# Altium PCB Layout.pcbdoc
Units mil, origin at the board's own origin, x right, y up, seen from the top; angles counter-clockwise.
Board outline 6990.03 x 6553.77 mil, 2 copper layers (Top Layer, Bottom Layer); 55 components, 66 nets, 351 pads, 42 vias.
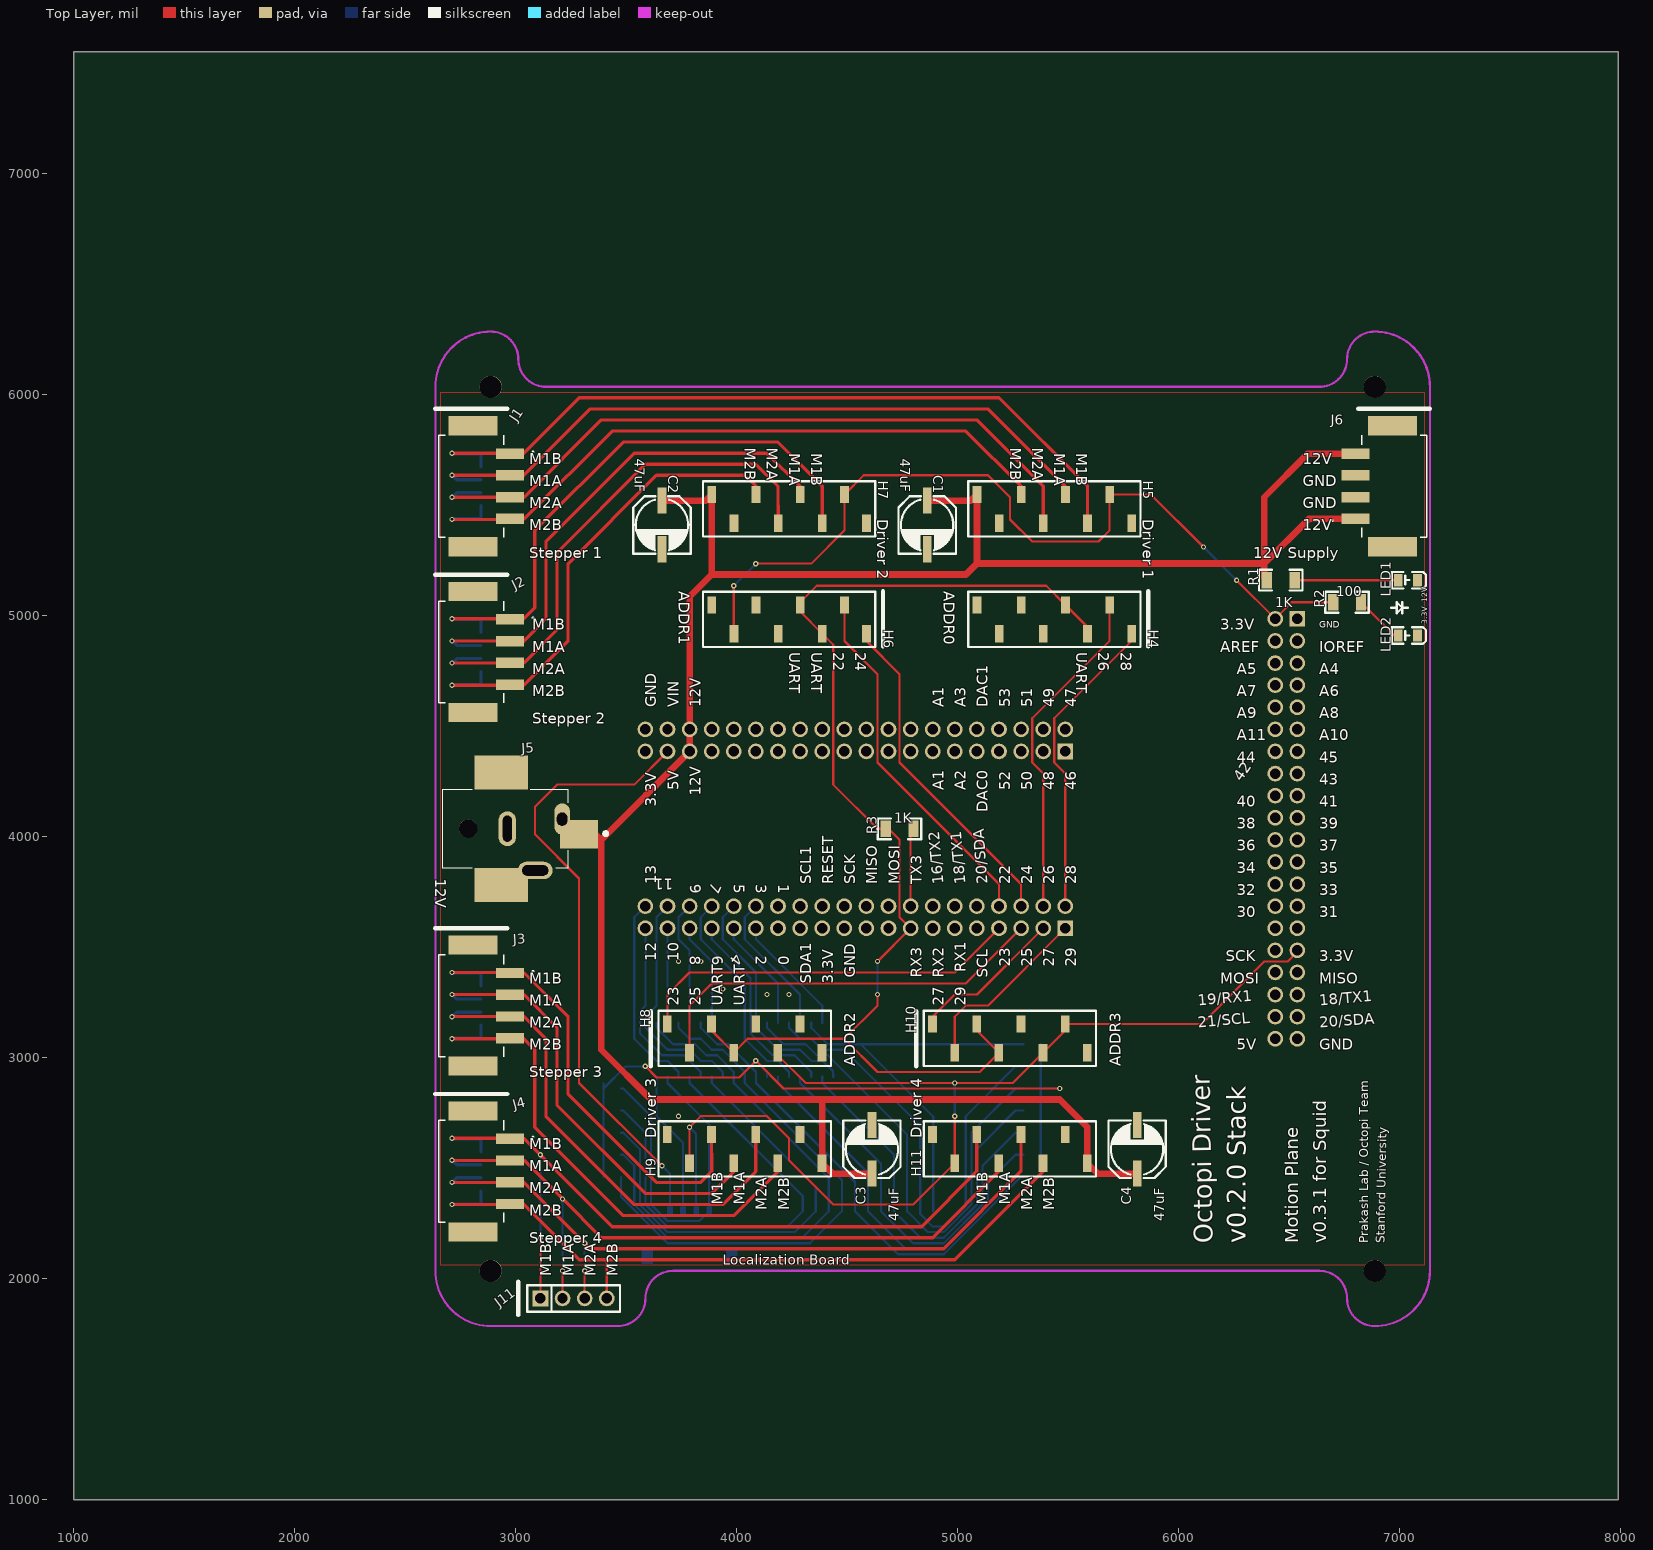
[diagram p0: Top Layer view]
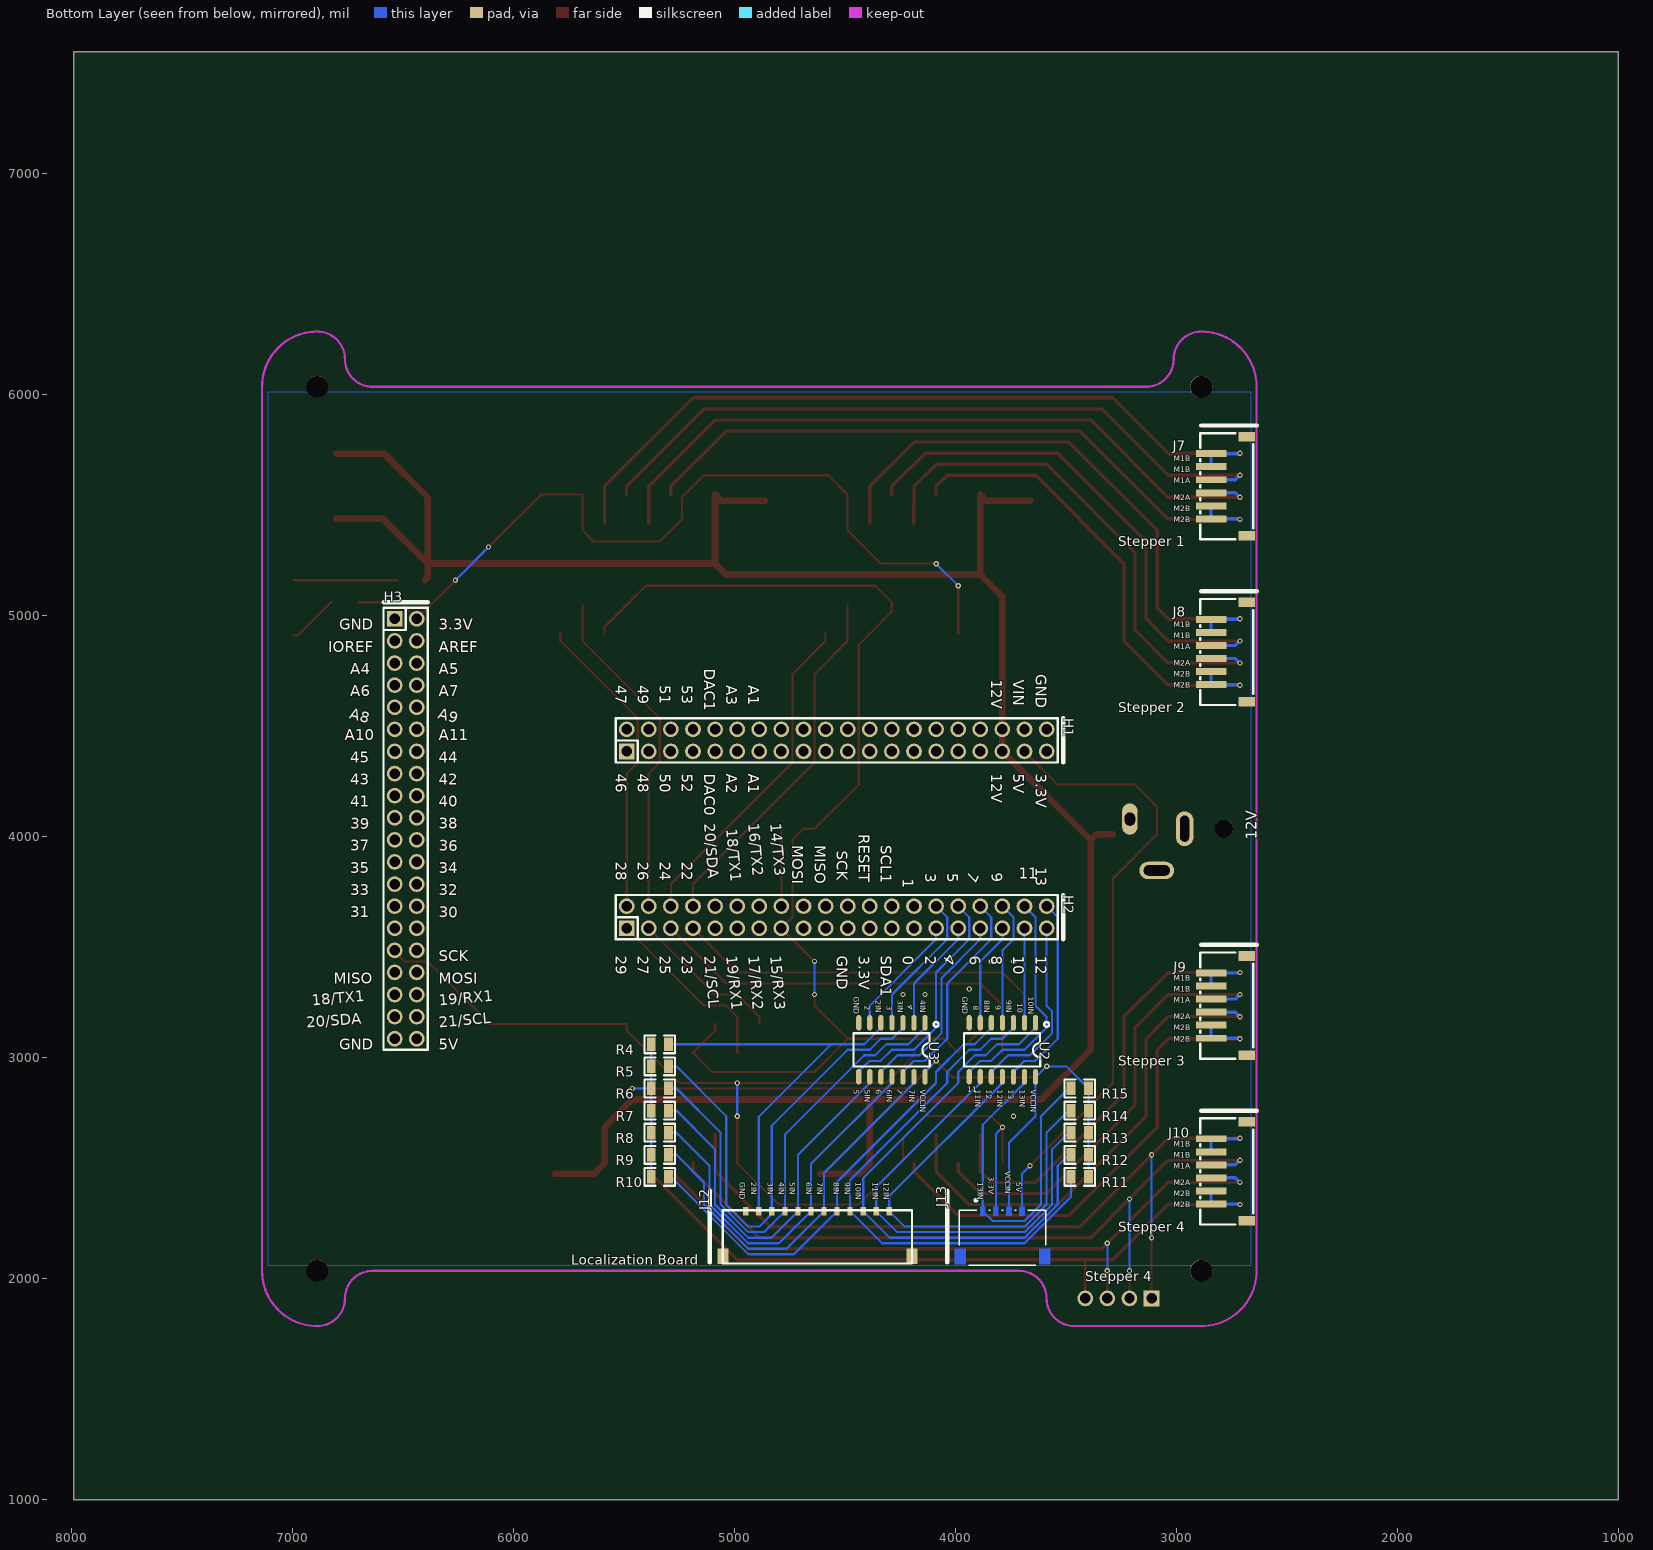
[diagram p1: Bottom Layer view, seen from below]

## Layer stack, top to bottom
Top Layer: signal copper (thickness not stored)
Dielectric: dielectric 12.6, FR-4, Dk 4.8
Bottom Layer: signal copper (thickness not stored)

## Board outline
7990.03,1000 1000,1000 1000,7553.77 7990.03,7553.77

## Components (designator, comment, footprint, x,y, rotation, side; value= is the part's Value field where it differs from the comment)
C1 "47uF" CAP-SMD_BD6.3-L6.6-W6.6-FD 4862.33,5411.97 r270 top
C2 "47uF" CAP-SMD_BD6.3-L6.6-W6.6-FD 3662.33,5411.97 r270 top
C3 "47uF" CAP-SMD_BD6.3-L6.6-W6.6-FD 4612.33,2586.97 r90 top
C4 "47uF" CAP-SMD_BD6.3-L6.6-W6.6-FD 5812.33,2586.97 r90 top
H1 "Header-Female-2.54_2x20" HDR-TH_40P-P2.54-V-R2-C20-S2.54 4537.33,4436.97 r0 bottom
H2 "Header-Female-2.54_2x20" HDR-TH_40P-P2.54-V-R2-C20-S2.54 4537.33,3636.97 r0 bottom
H3 "Header-Female-2.54_2x20" HDR-TH_40P-P2.54-V-R2-C20-S2.54 6487.33,4036.97 r90 bottom
H4 "Header-Female-2.54_1x2" NPPC081KFXC-RC 5437.33,4986.97 r0 top
H5 "Header-Female-2.54_1x2" NPPC081KFXC-RC 5437.33,5486.97 r0 top
H6 "Header-Female-2.54_1x2" NPPC081KFXC-RC 4237.33,4986.97 r0 top
H7 "Header-Female-2.54_1x2" NPPC081KFXC-RC 4237.33,5486.97 r0 top
H8 "Header-Female-2.54_1x2" NPPC081KFXC-RC 4037.33,3086.97 r180 top
H9 "Header-Female-2.54_1x2" NPPC081KFXC-RC 4037.33,2586.97 r180 top
H10 "Header-Female-2.54_1x2" NPPC081KFXC-RC 5237.33,3086.97 r180 top
H11 "Header-Female-2.54_1x2" NPPC081KFXC-RC 5237.33,2586.97 r180 top
J1 "1814935" 1814935 3037.33,5586.97 r270 top
J2 "1814935" 1814935 3037.33,4836.97 r270 top
J3 "1814935" 1814935 3037.33,3236.97 r270 top
J4 "1814935" 1814935 3037.33,2486.97 r270 top
J5 "PJ-037AH-SMT-TR" CUI_PJ-037AH-SMT-TR 3287.33,4011.97 r0 top
J6 "1814935" 1814935 6737.33,5586.97 r90 top
J7 "S6B-ZR-SM4A-TF(LF)(SN)" CONN-SMD_S6B-ZR-SM4A-TF 2762.33,5586.97 r270 bottom
J8 "S6B-ZR-SM4A-TF(LF)(SN)" CONN-SMD_S6B-ZR-SM4A-TF 2762.33,4836.97 r270 bottom
J9 "S6B-ZR-SM4A-TF(LF)(SN)" CONN-SMD_S6B-ZR-SM4A-TF 2762.33,3236.97 r270 bottom
J10 "S6B-ZR-SM4A-TF(LF)(SN)" CONN-SMD_S6B-ZR-SM4A-TF 2762.33,2486.97 r270 bottom
J11 "Header-Male-2.54_1x4" DIP-1X4P-2.54MM-M 3262.33,1911.97 r0 top
J12 "Molex_504050-1291" MOLEX_504050-1291 4287.33,2286.97 r180 bottom
J13 "MOLEX_504050-0491" MOLEX_504050-0491 3787.33,2186.97 r180 bottom
LED1 "17-21SYGC/S530-E2/TR8" LED0805-RD 7037.33,5161.97 r180 top
LED2 "17-21SYGC/S530-E2/TR8" LED0805-RD 7037.33,4911.97 r180 top
R1 "1K" R1206 6462.33,5161.97 r180 top
R2 "100" R1206 6762.33,5061.97 r180 top
R3 "1K" R1206 4737.33,4036.97 r0 top
R4 "4.7K" R0805 5337.33,3061.97 r0 bottom
R5 "4.7K" R0805 5337.33,2961.97 r0 bottom
R6 "4.7K" R0805 5337.33,2861.97 r0 bottom
R7 "4.7K" R0805 5337.33,2761.97 r0 bottom
R8 "4.7K" R0805 5337.33,2661.97 r0 bottom
R9 "4.7K" R0805 5337.33,2561.97 r0 bottom
R10 "4.7K" R0805 5337.33,2461.97 r0 bottom
R11 "4.7K" R0805 3437.33,2461.97 r180 bottom
R12 "4.7K" R0805 3437.33,2561.97 r180 bottom
R13 "4.7K" R0805 3437.33,2661.97 r180 bottom
R14 "4.7K" R0805 3437.33,2761.97 r180 bottom
R15 "4.7K" R0805 3437.33,2861.97 r180 bottom
U2 "74LVC07AD,118" SOIC-14_L8.7-W3.9-P1.27-LS6.0-BL 3787.33,3036.97 r180 bottom
U3 "74LVC07AD,118" SOIC-14_L8.7-W3.9-P1.27-LS6.0-BL 4287.33,3036.97 r180 bottom
? "" ? 7149.83,5250.05 r0 top
? "" ? 2222.91,4036.97 r0 top
? "" ? 2887.33,6581.87 r0 top
? "" ? 4887.33,6430.87 r0 top
? "" ? 2312.33,6369.72 r0 top
? "" ? 2294.66,1887 r0 top
? "" ? 2184.86,4036.97 r0 top
? "" ? 4887.33,6410.97 r0 top

## Footprints (in the part's own frame and the unit in brackets; to place one, negate y for a bottom-side part, rotate by r counter-clockwise, add the part's x,y. Pads: shape width x height; smd on the part's side, far side on the other; paste and mask are expansions set on the pad)
1814935 [mil]
  rect 47.24x125.98 smd: 1(-147.64,-62.99) 2(-49.21,-62.99) 3(49.21,-62.99) 4(147.64,-62.99)
  rect 86.61x220.47 smd: MP1(-273.62,-230.31) MP2(273.62,-230.31)
  silkscreen extent -230,-386 230,43
CAP-SMD_BD6.3-L6.6-W6.6-FD [mm]
  rect 3x1 smd: 1(-2.8,0) 2(2.8,0)
  silkscreen extent -3.3,-3.3 3.3,3.3
CONN-SMD_S6B-ZR-SM4A-TF [mm]
  rect 1.1x1.9 smd: 0(-5.7,2.05) 0(5.7,2.05)
  rect 0.8x3.5 smd: 1(-3.75,-2.05) 2(-2.25,-2.05) 3(-0.75,-2.05) 4(0.75,-2.05) 5(2.25,-2.05) 6(3.75,-2.05)
  silkscreen extent -6.1,-3.3 6.1,2.79
CUI_PJ-037AH-SMT-TR [mm]
  rect 4.4x3.3 smd: 1A(0,0)
  oval 1.8x3.6 hole 1.2 slot 1.5 at 90 deg: 1B(-1.95,1.75)
  rect 6.2x3.9 smd: 2A(-8.95,7.1) 3A(-8.95,-5.8)
  oval 2x4 hole 1 slot 3 at 90 deg: 2B(-8.25,0.65)
  oval 4x2 hole 1.2 slot 3 at 0 deg: 3B(-5.05,-4.15)
  round 2.1 hole 2.1 unplated: ""(-12.75,0.65)
  silkscreen extent -15.75,-3.85 3.26,5.15
DIP-1X4P-2.54MM-M [mm]
  rect 1.8x1.8 hole 1.2: 1(-3.81,0)
  round 1.8 hole 1.2: 2(-1.27,0) 3(1.27,0) 4(3.81,0)
  silkscreen extent -5.33,-1.52 5.33,1.52
HDR-TH_40P-P2.54-V-R2-C20-S2.54 [mm]
  rect 1.8x1.8 hole 1.2: 1(24.13,1.27)
  round 1.8 hole 1.2: 2(24.13,-1.27) 3(21.59,1.27) 4(21.59,-1.27) 5(19.05,1.27) 6(19.05,-1.27) 7(16.51,1.27) 8(16.51,-1.27) 9(13.97,1.27) 10(13.97,-1.27) 11(11.43,1.27) 12(11.43,-1.27) 13(8.89,1.27) 14(8.89,-1.27) 15(6.35,1.27) 16(6.35,-1.27) 17(3.81,1.27) 18(3.81,-1.27) 19(1.27,1.27) 20(1.27,-1.27) 21(-1.27,1.27) 22(-1.27,-1.27) 23(-3.81,1.27) 24(-3.81,-1.27) 25(-6.35,1.27) 26(-6.35,-1.27) 27(-8.89,1.27) 28(-8.89,-1.27) 29(-11.43,1.27) 30(-11.43,-1.27) 31(-13.97,1.27) 32(-13.97,-1.27) 33(-16.51,1.27) 34(-16.51,-1.27) 35(-19.05,1.27) 36(-19.05,-1.27) 37(-21.59,1.27) 38(-21.59,-1.27) 39(-24.13,1.27) 40(-24.13,-1.27)
  silkscreen extent -25.4,-2.54 25.4,2.54
LED0805-RD [mm]
  rect 1x1.4 smd: 1(-1.1,0) 2(1.1,0)
  silkscreen extent -2.1,-0.95 1.85,0.95
MOLEX_504050-0491 [mil]
  round 0 smd: 1(-88.58,119.68) 2(-29.53,119.68) 3(29.53,119.68) 4(88.58,119.68) 5(191.14,-84.65) 6(-191.14,-84.65)
  Top Layer region: -76.77,100 -100.39,100 -100.39,139.37 -76.77,139.37
  Top Layer region: -17.72,100 -41.34,100 -41.34,139.37 -17.72,139.37
  Top Layer region: 41.34,100 17.72,100 17.72,139.37 41.34,139.37
  Top Layer region: 100.39,100 76.77,100 76.77,139.37 100.39,139.37
  Top Layer region: 215.75,-120.08 166.54,-120.08 166.54,-49.21 215.75,-49.21
  Top Layer region: -166.54,-120.08 -215.75,-120.08 -215.75,-49.21 -166.54,-49.21
  silkscreen extent -196,-124 196,179
MOLEX_504050-1291 [mm]
  rect 1.25x1.8 smd: 0(-19.405,-4.69) 0(2.305,-4.69)
  rect 0.6x1 smd: 1(-16.8,0.5) 2(-15.3,0.5) 3(-13.8,0.5) 4(-12.3,0.5) 5(-10.8,0.5) 6(-9.3,0.5) 7(-7.8,0.5) 8(-6.3,0.5) 9(-4.8,0.5) 10(-3.3,0.5) 11(-1.8,0.5) 12(-0.3,0.5)
  silkscreen extent -19.44,-5.5 2.31,0.6
NPPC081KFXC-RC [mm]
  rect 1x2 smd: 1(8.902,-1.702) 2(6.362,1.598) 3(3.822,-1.702) 4(1.282,1.598) 5(-1.258,-1.702) 6(-3.798,1.598) 7(-6.338,-1.702) 8(-8.878,1.598)
  silkscreen extent -9.89,-3.23 9.92,3.12
R0805 [mm]
  rect 1x1.55 smd: 1(1,0) 2(-1,0)
  silkscreen extent -1.75,-1.02 1.75,1.02
R1206 [mm]
  rect 1.2x1.9 smd: 1(-1.6,0) 2(1.6,0)
  silkscreen extent -2.5,-1.2 2.5,1.2
SOIC-14_L8.7-W3.9-P1.27-LS6.0-BL [mm]
  oval 0.6x1.798 smd: 1(3.81,3.1) 2(2.54,3.1) 3(1.27,3.1) 4(0,3.1) 5(-1.27,3.1) 6(-2.54,3.1) 7(-3.81,3.1) 8(-3.81,-3.1) 9(-2.54,-3.1) 10(-1.27,-3.1) 11(0,-3.1) 12(1.27,-3.1) 13(2.54,-3.1) 14(3.81,-3.1)
  silkscreen extent -4.4,-1.91 5.36,3.2
? [mil]

## Free pads (board coordinates)
  round 100 hole 100 unplated: ""(2887.33,2036.97) ""(2887.33,6036.97) ""(6887.33,2036.97) ""(6887.33,6036.97)

## Via types
v1: diameter 24, hole 12, Top Layer to Bottom Layer, 42 vias

## Nets (pads, with @x,y where several pads share a name; then routed paths per layer and width w, separated by ;. In a path a pad name is that pad's centre, name@x,y a point inside that pad or via, vN(x,y) a via of type N, cw(c..) or ccw(c..) an arc to the next point about the centre after c; other vN are vias at no path point)
2: H2.29 U3.6 | length 552.2
  Bottom Layer w10: H2.29 4087.33,3536.97 4387.33,3236.97 U3.6@4387.33,3159.07
2IN: J12.2 R4.2 U3.5 | length 1904.7
  Bottom Layer w10: U3.5@4337.33,3159.07 4337.33,3136.97 4412.33,3061.97 4562.33,3061.97 ; J12.2 4889.73,2734.57 4562.33,3061.97 ; R4.2 4562.33,3061.97
3: H2.30 U3.4 | length 652.2
  Bottom Layer w10: H2.30 4037.33,3636.97 4037.33,3536.97 4287.33,3286.97 U3.4@4287.33,3159.07
3.3V..: H3.2 H5.2 H6.7 H7.2 R2.2 | length 3861.9
  Top Layer w10: v1(3987.33,5136.97) 3987.33,4920.45 H6.7 ; v1(4087.33,5236.97) 4337.33,5236.97 4487.8,5387.44 H7.2 ; H7.2 4574.83,5636.97 5137.33,5636.97 5237.33,5536.97 5237.33,5436.97 5337.33,5336.97 5637.33,5336.97 5687.83,5387.47 H5.2 ; H5.2 5874.4,5549.9 v1(6112.33,5311.97) ; v1(6262.33,5161.97) H3.2 6512.33,5061.97 R2.2
  Bottom Layer w10: v1(3987.33,5136.97) v1(4087.33,5236.97) ; v1(6112.33,5311.97) v1(6262.33,5161.97)
3.3V...: H3.31 H8.6 H9.2 H10.6 H10.7 H11.2 J13.2 | length 5129.6
  Top Layer w10: H9.2@3786.83,2524.07 v1(3786.83,2686.47) 3837.33,2736.97 4137.33,2736.97 4237.33,2636.97 4237.33,2536.97 4437.33,2336.97 4799.83,2336.97 4986.83,2524.07 4987.33,2524.51 v1(4987.33,2736.97) ; H8.6@4186.83,3024.07 4186.83,3012.47 4312.33,2886.97 v1(4987.33,2886.97) 5249.83,2886.97 H10.6@5391.73,3028.97 ; H10.6 5486.86,3124.04 H10.7 6104.33,3153.97 6387.33,3436.97 6494.13,3436.97 H3.31@6540.73,3483.57
  Bottom Layer w10: v1(3786.83,2686.47) 3816.86,2656.44 J13.2 ; v1(4987.33,2736.97) v1(4987.33,2886.97)
3IN: J12.3 R5.2 U3.3 | length 2224.4
  Bottom Layer w10: U3.3@4237.33,3159.07 4237.33,3136.97 4287.33,3086.97 4337.33,3086.97 4387.33,3036.97 4487.33,3036.97 4830.63,2693.67 J12.3 4830.63,2293.67 4887.33,2236.97 4937.33,2236.97 5037.33,2336.97 5037.33,2736.97 5262.33,2961.97 R5.2@5297.93,2961.97
4: H2.31 U3.2 | length 510.7
  Bottom Layer w10: H2.31 3987.33,3536.97 4187.33,3336.97 U3.2@4187.33,3159.07
4IN: J12.4 R6.2 U3.1 | length 2228.2
  Bottom Layer w10: U3.1 4137.33,3136.97 4212.33,3061.97 4312.33,3061.97 4362.33,3011.97 4412.33,3011.97 4771.58,2652.72 J12.4 ; J12.4@4771.53,2306.67 4866.23,2211.97 4937.33,2211.97 5062.33,2336.97 5062.33,2661.97 5262.33,2861.97 R6.2@5297.93,2861.97
5: H2.32 U3.8 | length 1088.5
  Bottom Layer w10: H2.32 3937.33,3636.97 3937.33,3536.97 4087.33,3386.97 4087.33,3136.97 4187.33,3036.97 4287.33,3036.97 4337.33,2986.97 4387.33,2986.97 4436.33,2941.47 U3.8
5IN: J12.5 R7.2 U3.9 | length 1762.6
  Bottom Layer w10: U3.9 4387.33,2886.97 4712.53,2561.77 J12.5 4832.23,2186.97 4937.33,2186.97 5087.33,2336.97 5087.33,2586.97 5262.33,2761.97 R7.2@5297.93,2761.97
5V: H1.37 J13.4 | length 2787.1
  Top Layer w10: v1(3662.33,2511.97) 3287.33,2886.97 3287.33,3811.97 3087.33,4011.97 3087.33,4136.97 3187.33,4236.97 3537.33,4236.97 H1.37
  Bottom Layer w10: v1(3662.33,2511.97) 3698.75,2475.55 J13.4
6: H2.33 U3.10 | length 917.1
  Bottom Layer w10: H2.33 3887.33,3536.97 4062.33,3361.97 4062.33,3111.97 4162.33,3011.97 4262.33,3011.97 4337.33,2936.97 U3.10
6IN: J12.6 R8.2 U3.11 | length 1774
  Bottom Layer w10: U3.11 4287.33,2886.97 4653.47,2520.83 J12.6 4798.13,2161.97 4937.33,2161.97 5112.33,2336.97 5112.33,2511.97 5262.33,2661.97 R8.2@5297.93,2661.97
7: H2.34 U3.12 | length 987.8
  Bottom Layer w10: H2.34 3837.33,3636.97 3837.33,3536.97 4037.33,3336.97 4037.33,3086.97 4137.33,2986.97 4187.33,2986.97 4237.33,2936.97 U3.12
7IN: J12.7 R9.2 U3.13 | length 1785.3
  Bottom Layer w10: U3.13 4187.33,2886.97 4594.42,2479.88 J12.7 ; J12.7 4764.13,2136.97 4937.33,2136.97 5137.33,2336.97 5137.33,2436.97 5262.33,2561.97 R9.2@5297.93,2561.97
8: H2.35 U2.6 | length 469.3
  Bottom Layer w10: H2.35 3787.33,3536.97 3887.33,3436.97 U2.6@3887.33,3159.07
8IN: J12.8 R10.2 U2.5 | length 2159.1
  Bottom Layer w10: U2.5@3837.33,3159.07 3837.33,3136.97 3912.33,3061.97 3962.33,3061.97 4087.33,2936.97 4087.33,2886.97 4535.36,2438.94 J12.8 4730.05,2111.97 4937.33,2111.97 5287.33,2461.97 R10.2
9: H2.36 U2.4 | length 569.3
  Bottom Layer w10: U2.4@3787.33,3159.07 3787.33,3486.97 3737.33,3536.97 3737.33,3636.97 H2.36
9IN: J12.9 R11.2 U2.3 | length 2453.2
  Bottom Layer w10: R11.2 3476.7,2372.6 3687.33,2161.97 4331.62,2161.97 J12.9 4476.31,2447.99 4037.33,2886.97 4037.33,2936.97 3937.33,3036.97 3887.33,3036.97 3837.33,3086.97 3787.33,3086.97 3737.33,3136.97 U2.3@3737.33,3159.07
10: H2.37 U2.2 | length 427.9
  Bottom Layer w10: U2.2 3687.33,3486.97 H2.37
10IN: J12.10 R12.2 U2.1 | length 2511.3
  Bottom Layer w10: R12.2 3487.33,2561.97 3537.33,2511.97 3537.33,2336.97 3687.33,2186.97 4297.53,2186.97 J12.10 4417.25,2457.05 3987.33,2886.97 3987.33,2936.97 3912.33,3011.97 3862.33,3011.97 3812.33,3061.97 3712.33,3061.97 3637.33,3136.97 U2.1@3637.33,3159.07
11: H2.38 U2.8 | length 1046.4
  Bottom Layer w10: H2.38 3637.33,3636.97 3637.33,3236.97 3587.33,3186.97 3587.33,3136.97 3687.33,3036.97 3787.33,3036.97 3837.33,2986.97 3887.33,2986.97 3937.33,2936.97 U2.8
11IN: J12.11 R13.2 U2.9 | length 2056.9
  Bottom Layer w10: R13.2 3487.33,2661.97 3562.33,2586.97 3562.33,2336.97 3687.33,2211.97 4263.53,2211.97 J12.11 ; U2.9 3887.33,2886.97 4358.2,2416.1 J12.11
12: H2.39 U2.10 | length 854.9
  Bottom Layer w10: H2.39 3587.33,3236.97 3562.33,3211.97 3562.33,3111.97 3662.33,3011.97 3762.33,3011.97 3837.33,2936.97 U2.10
12IN: J12.12 R14.2 U2.11 | length 2079.4
  Bottom Layer w10: R14.2 3487.33,2761.97 3587.33,2661.97 3587.33,2336.97 3687.33,2236.97 4229.43,2236.97 J12.12 4299.14,2375.16 3787.33,2886.97 U2.11
12V: C1.1 C2.1 C3.1 C4.1 H1.35 H1.36 H5.8 H7.8 H9.8 H11.8 J5.1A J5.1B J6.1 J6.4 R1.2 | length 10794
  Top Layer w30: J5.1A 3362.33,4011.97 3387.33,3986.97 ; C2.1 3860.16,5522.21 H7.8 ; H7.8 3887.83,5187.47 ; C3.1 4434.17,2476.73 H9.8 4386.83,2811.97 ; C1.1 5060.16,5522.21 H5.8 ; H5.8 5087.83,5237.47 ; C4.1 5634.17,2476.73 H11.8 5586.83,2687.47 5462.33,2811.97 4386.83,2811.97 ; R1.2 6387.83,5173.48 6387.83,5237.47 ; J6.1 6589.69,5439.33 6387.83,5237.47 ; J6.4 6584.93,5734.57 6387.33,5536.97 6387.83,5237.47 ; 3387.33,3986.97 3387.33,3036.97 3612.33,2811.97 4386.83,2811.97 ; 3387.33,3986.97 H1.35 H1.36 3787.33,5086.97 3887.83,5187.47 ; 3887.83,5187.47 5037.83,5187.47 5087.83,5237.47 ; 5087.83,5237.47 6387.83,5237.47
13: H2.40 U2.12 | length 904.9
  Bottom Layer w10: H2.40 3537.33,3636.97 3537.33,3086.97 3637.33,2986.97 3687.33,2986.97 3737.33,2936.97 U2.12
13IN: J13.1 R15.2 U2.13 | length 1586.9
  Bottom Layer w10: R15.2 3487.33,2861.97 3612.33,2736.97 3612.33,2336.97 3687.33,2261.97 3831.23,2261.97 J13.1 ; U2.13 3687.33,2886.97 3875.91,2698.39 J13.1
14: H2.16 R3.2 | length 366.1
  Top Layer w10: H2.16@4789.53,3684.77 H2.16 4787.33,4036.97 R3.2
15: H2.15 H4.3 H4.4 H6.3 H6.4 H8.3 H8.4 H10.3 H10.4 R3.1 | length 5441.2
  Top Layer w10: H8.3 3886.86,3124.04 H8.4 4049.79,3086.97 4487.33,3086.97 ; H6.4 4287.8,5019.98 H6.3 4437.33,4870.45 4437.33,4236.97 4637.33,4036.97 R3.1 4687.33,4036.97 4737.33,3986.97 4737.33,3636.97 H2.15 v1(4637.33,3436.97) ; H6.4 4287.83,5062.47 4362.33,5136.97 5400.73,5136.97 H4.4 ; v1(4637.33,3286.97) 4637.33,3236.97 4487.33,3086.97 ; H10.3 5086.86,3124.04 H10.4 5099.79,2936.97 4637.33,2936.97 4487.33,3086.97 ; H4.4 5587.8,4949.9 H4.3
  Bottom Layer w10: v1(4637.33,3286.97) v1(4637.33,3436.97)
  other v1: 4637.33,3286.97
22: H2.8 H6.2 | length 1652.6
  Top Layer w10: H6.2 4487.83,4886.47 4637.33,4736.97 4637.33,4336.97 5187.33,3786.97 H2.8
23: H2.7 H8.1 | length 1757.5
  Top Layer w10: H8.1@3686.83,3153.97 3686.83,3286.47 3787.33,3386.97 4987.33,3386.97 H2.7
24: H2.6 H6.1 | length 1522.7
  Top Layer w10: H6.1 4587.83,4886.47 4737.33,4736.97 4737.33,4336.97 5287.33,3786.97 H2.6
25: H2.5 H8.2 | length 1858.1
  Top Layer w10: H8.2@3786.83,3024.07 3786.83,3236.47 3887.33,3336.97 5037.33,3336.97 H2.5
26: H2.4 H4.2 | length 1528.8
  Top Layer w10: H2.4 5387.33,4286.97 5337.33,4336.97 5337.33,4536.97 5687.8,4887.44 H4.2
27: H2.3 H10.1 | length 698.9
  Top Layer w10: H10.1@4886.83,3153.97 4886.83,3186.47 4987.33,3286.97 5087.33,3286.97 H2.3
28: H2.2 H4.1 | length 1398.9
  Top Layer w10: H2.2 5487.33,4286.97 5437.33,4336.97 5437.33,4536.97 5787.8,4887.44 H4.1
29: H2.1 H10.2 | length 828.8
  Top Layer w10: H10.2 4986.86,3186.5 5037.33,3236.97 5137.33,3236.97 H2.1
D1M1A: H5.4 J1.2 J7.3 | length 3221.1
  Top Layer w15: v1(2712.33,5636.97) J1.2 3036.53,5636.17 3337.33,5936.97 5137.33,5936.97 5487.83,5586.47 H5.4
  Bottom Layer w15: v1(2712.33,5636.97) 2732.8,5616.5 J7.3
D1M1B: H5.3 J1.1 J7.1 J7.2 | length 3504.2
  Top Layer w15: v1(2712.33,5736.97) 2971.98,5736.97 J1.1 ; J1.1 3034.93,5734.57 3287.33,5986.97 5187.33,5986.97 5587.83,5586.47 H5.3
  Bottom Layer w15: v1(2712.33,5736.97) 2714.69,5734.61 J7.1 J7.2
D1M2A: H5.5 J1.3 J7.4 | length 3250.3
  Top Layer w15: v1(2712.33,5536.97) J1.3 3038.13,5537.77 3387.33,5886.97 5087.33,5886.97 5387.83,5586.47 H5.5
  Bottom Layer w15: v1(2712.33,5536.97) 2732.8,5557.44 J7.4
D1M2B: H5.6 J1.4 J7.5 J7.6 | length 3072.3
  Top Layer w15: v1(2712.33,5436.97) 2971.98,5436.97 J1.4 3039.73,5439.37 3437.33,5836.97 5037.33,5836.97 5287.83,5586.47 H5.6
  Bottom Layer w15: v1(2712.33,5436.97) 2714.69,5439.33 J7.6 J7.5
D2M1A: H7.4 J2.2 J8.3 | length 2371.1
  Top Layer w15: v1(2712.33,4886.97) J2.2 3036.53,4886.17 3137.33,4986.97 3137.33,5336.97 3537.33,5736.97 4137.33,5736.97 4287.83,5586.47 H7.4
  Bottom Layer w15: v1(2712.33,4886.97) 2732.8,4866.5 J8.3
D2M1B: H7.3 J2.1 J8.1 J8.2 | length 2654.2
  Top Layer w15: v1(2712.33,4986.97) 2971.98,4986.97 J2.1 ; J2.1 3034.93,4984.57 3087.33,5036.97 3087.33,5386.97 3487.33,5786.97 4187.33,5786.97 4387.83,5586.47 H7.3
  Bottom Layer w15: v1(2712.33,4986.97) 2714.69,4984.61 J8.1 J8.2
D2M2A: H7.5 J2.3 J8.4 | length 2400.1
  Top Layer w15: v1(2712.33,4786.97) J2.3 3038.13,4787.77 3187.33,4936.97 3187.33,5286.97 3587.33,5686.97 4087.33,5686.97 4187.33,5586.97 H7.5
  Bottom Layer w15: v1(2712.33,4786.97) 2732.8,4807.44 J8.4
D2M2B: H7.6 J2.4 J8.5 J8.6 | length 2222.3
  Top Layer w15: v1(2712.33,4686.97) 2971.93,4686.97 2974.33,4689.37 3039.73,4689.37 3237.33,4886.97 3237.33,5236.97 3637.33,5636.97 4037.33,5636.97 4087.83,5586.47 H7.6
  Bottom Layer w15: v1(2712.33,4686.97) 2714.69,4689.33 J8.6 J8.5
D3M1A: H9.4 J3.2 J9.3 | length 2070.1
  Top Layer w15: v1(2712.33,3286.97) J3.2 3038.13,3286.17 3187.33,3136.97 3187.33,2786.97 3587.33,2386.97 3887.33,2386.97 3986.83,2485.97 H9.4@3986.83,2524.07
  Bottom Layer w15: v1(2712.33,3286.97) 2732.8,3266.5 J9.3
D3M1B: H9.3 J3.1 J9.1 J9.2 | length 2152
  Top Layer w15: v1(2712.33,3386.97) 2971.98,3386.97 J3.1 ; J3.1 3039.73,3384.57 3237.33,3186.97 3237.33,2836.97 3637.33,2436.97 3837.33,2436.97 3887.33,2486.97 H9.3@3886.83,2653.97
  Bottom Layer w15: v1(2712.33,3386.97) 2714.69,3384.61 J9.1 J9.2
D3M2A: H9.5 J3.3 J9.4 | length 2300.7
  Top Layer w15: v1(2712.33,3186.97) J3.3 3036.53,3187.77 3137.33,3086.97 3137.33,2736.97 3537.33,2336.97 3937.33,2336.97 4086.83,2485.97 H9.5@4086.83,2653.97
  Bottom Layer w15: v1(2712.33,3186.97) 2732.8,3207.44 J9.4
D3M2B: H9.6 J3.4 J9.5 J9.6 | length 2324
  Top Layer w15: v1(2712.33,3086.97) 2971.98,3086.97 J3.4 3034.93,3089.37 3087.33,3036.97 3087.33,2686.97 3487.33,2286.97 3987.33,2286.97 4186.83,2485.97 H9.6@4186.83,2524.07
  Bottom Layer w15: v1(2712.33,3086.97) 2714.69,3089.33 J9.6 J9.5
D4M1A: H11.4 J4.2 J10.3 J11.2 | length 3370
  Top Layer w10: J11.2 v1(3212.33,2036.97)
  Top Layer w15: v1(2712.33,2536.97) J4.2 ; J4.2 3038.12,2536.18 v1(3212.33,2361.97) 3387.33,2186.97 4887.33,2186.97 5186.83,2486.47 H11.4@5186.83,2524.07
  Bottom Layer w10: v1(3212.33,2036.97) v1(3212.33,2361.97)
  Bottom Layer w15: v1(2712.33,2536.97) 2732.8,2516.5 J10.3
D4M1B: H11.3 J4.1 J10.1 J10.2 J11.1 | length 3651.8
  Top Layer w10: J11.1 v1(3112.33,2186.97)
  Top Layer w15: v1(2712.33,2636.97) 2971.98,2636.97 J4.1 3039.69,2634.61 v1(3112.33,2561.97) 3437.33,2236.97 4837.33,2236.97 5086.83,2486.47 H11.3@5086.83,2653.97
  Bottom Layer w10: v1(3112.33,2186.97) v1(3112.33,2561.97)
  Bottom Layer w15: v1(2712.33,2636.97) 2714.69,2634.61 J10.1 J10.2
D4M2A: H11.5 J4.3 J10.4 J11.3 | length 3400.5
  Top Layer w10: J11.3 v1(3312.33,2036.97)
  Top Layer w15: v1(2712.33,2436.97) J4.3 3036.54,2437.76 v1(3312.33,2161.97) 3337.33,2136.97 4937.33,2136.97 5286.83,2486.47 H11.5@5286.83,2653.97
  Bottom Layer w10: v1(3312.33,2036.97) v1(3312.33,2161.97)
  Bottom Layer w15: v1(2712.33,2436.97) 2732.8,2457.44 J10.4
D4M2B: H11.6 J4.4 J10.5 J10.6 J11.4 | length 3359.5
  Top Layer w10: J11.4 3412.33,2086.97
  Top Layer w15: v1(2712.33,2336.97) 2982.61,2336.97 J4.4@2984.97,2339.33 ; J4.4@2974.33,2339.37 3034.93,2339.37 3287.33,2086.97 4987.33,2086.97 5386.83,2486.47 H11.6@5386.83,2524.07
  Bottom Layer w15: v1(2712.33,2336.97) 2714.69,2339.33 J10.6 J10.5
GND: C1.2 C2.2 C3.2 C4.2 H1.40 H2.21 H3.1 H3.39 H4.6 H4.7 H4.8 H5.1 H5.7 H6.6 H6.8 H7.1 H7.7 H8.7 H8.8 H9.1 H9.7 H10.8 H11.1 H11.7 J1.MP1 J1.MP2 J2.MP1 J2.MP2 J3.MP1 J3.MP2 J4.MP1 J4.MP2 J5.2A J5.2B J6.2 J6.3 J6.MP1 J6.MP2 J12.1 J13.5 J13.6 LED1.1 LED2.1 U2.7 U3.7
  other v1: 3737.33,2736.97 4137.33,3286.97 4237.33,3286.97 3937.33,3311.97 3737.33,3436.97 3837.33,3436.97
J5_3A: J5.3A J5.3B
LED1_2: LED1.2 R1.1 | length 468.7
  Top Layer w10: R1.1 LED1.2
LED2_2: LED2.2 R2.1 | length 230.8
  Top Layer w10: R2.1 6975.32,4911.97 LED2.2
S$15: 
S$17: 
S$18709: 
S$25052: 
S$25054: 
S$25056: 
S$25058: 
VCCIN: J13.3 R4.1 R5.1 R6.1 R7.1 R8.1 R9.1 R10.1 R11.1 R12.1 R13.1 R14.1 R15.1 U2.14 U3.14 | length 4215.4
  Top Layer w10: v1(3587.33,2961.97) 3637.33,2911.97 4012.33,2911.97 v1(4087.33,2986.97) 4212.33,2861.97 v1(5462.33,2861.97)
  Bottom Layer w10: R11.1 R12.1@3397.96,2586.97 ; R12.1 R13.1@3397.96,2686.97 ; R13.1 R14.1@3397.96,2786.97 ; R14.1 R15.1@3397.96,2886.97 ; R15.1 3497.96,2961.97 v1(3587.33,2961.97) 3634.43,2914.87 U2.14 3637.33,2736.97 3757.8,2616.5 J13.3 ; v1(4087.33,2986.97) 4137.33,2936.97 U3.14 ; R10.1 R9.1 R8.1 R7.1 R6.1 ; R4.1 R5.1 R6.1 ; v1(5462.33,2861.97) R6.1
pads on no net: H1.1 H1.2 H1.3 H1.4 H1.5 H1.6 H1.7 H1.8 H1.9 H1.10 H1.11 H1.12 H1.13 H1.14 H1.15 H1.16 H1.17 H1.18 H1.19 H1.20 H1.21 H1.22 H1.23 H1.24 H1.25 H1.26 H1.27 H1.28 H1.29 H1.30 H1.31 H1.32 H1.33 H1.34 H1.38 H1.39 H2.9 H2.10 H2.11 H2.12 H2.13 H2.14 H2.17 H2.18 H2.19 H2.20 H2.22 H2.23 H2.24 H2.25 H2.26 H2.27 H2.28 H3.3 H3.4 H3.5 H3.6 H3.7 H3.8 H3.9 H3.10 H3.11 H3.12 H3.13 H3.14 H3.15 H3.16 H3.17 H3.18 H3.19 H3.20 H3.21 H3.22 H3.23 H3.24 H3.25 H3.26 H3.27 H3.28 H3.29 H3.30 H3.32 H3.33 H3.34 H3.35 H3.36 H3.37 H3.38 H3.40 H4.5 H6.5 H8.5 H10.5 J5. J7.0 J8.0 J9.0 J10.0 J12.0

## Polygon pours and split planes (outlines as drawn)
GND on Top Layer (solid): 2662.33,6011.97 7112.33,6011.97 7112.33,2061.97 2662.33,2061.97 2662.33,4036.97
GND on Bottom Layer (solid): 2662.33,6011.97 7112.33,6011.97 7112.33,2061.97 2662.33,2061.97 2662.33,4036.97

## Keep-outs
Keep-Out Layer:
  lines w10: 2637.33,2036.97 ccw(c2887.33,2036.97) 2887.33,1786.97 ; 2637.33,6036.97 cw(c2887.33,6036.97) 2887.33,6286.97 cw(c2887.33,6161.97) 3012.33,6161.97 ccw(c3137.33,6161.97) 3137.33,6036.97 ; 3462.33,1786.97 ccw(c3462.33,1911.97) 3587.33,1911.97 cw(c3712.33,1911.97) 3712.33,2036.97 ; 6637.33,2036.97 cw(c6637.33,1911.97) 6762.33,1911.97 ccw(c6887.33,1911.97) 6887.33,1786.97 ccw(c6887.33,2036.97) 7137.33,2036.97 ; 6637.33,6036.97 ccw(c6637.33,6161.97) 6762.33,6161.97 cw(c6887.33,6161.97) 6887.33,6286.97 cw(c6887.33,6036.97) 7137.33,6036.97

## Silkscreen, mask and mechanical layers (free items; w line width, h text height)
Top Overlay:
  lines w10 net S$25052: 6987.33,5011.97 6987.33,5061.97 7012.33,5036.97 6987.33,5011.97
  lines w10 net S$25054: 7012.33,5011.97 7012.33,5061.97
  lines w10 net S$25056: 7012.33,5036.97 7037.33,5036.97
  lines w10 net S$25058: 6962.33,5036.97 6987.33,5036.97
  lines w20 net S$18709: 2637.33,2836.97 2962.33,2836.97 ; 2637.33,3586.97 2962.33,3586.97 ; 2637.33,5186.97 2962.33,5186.97 ; 2637.33,5936.97 2962.33,5936.97 ; 3012.33,1836.97 3012.33,1986.97 ; 3612.33,2961.97 3612.33,3211.97 ; 4662.33,4861.97 4662.33,5111.97 ; 4812.33,2961.97 4812.33,3211.97 ; 5862.33,4861.97 5862.33,5111.97 ; 6812.33,5936.97 7137.33,5936.97
  text "M2B" at 4037.33,5761.97 h50 r270
  text "M2A" at 4137.33,5761.97 h50 r270
  text "M2B" at 5237.33,5761.97 h50 r270
  text "M2A" at 5337.33,5761.97 h50 r270
  text "M1A" at 4237.33,5736.97 h50 r270
  text "M1B" at 4337.33,5736.97 h50 r270
  text "M1A" at 5437.33,5736.97 h50 r270
  text "M1B" at 5537.33,5736.97 h50 r270
  text "M1B" at 3062.33,5686.97 h50
  text "12V" at 6562.33,5686.97 h50
  text "M1A" at 3062.33,5586.97 h50
  text "GND" at 6562.33,5586.97 h50
  text "M2A" at 3062.33,5486.97 h50
  text "GND" at 6562.33,5486.97 h50
  text "Driver 2" at 4637.33,5436.97 h50 r270
  text "Driver 1" at 5837.33,5436.97 h50 r270
  text "M2B" at 3062.33,5386.97 h50
  text "12V" at 6562.33,5386.97 h50
  text "Stepper 1" at 3062.33,5261.97 h50
  text "12V Supply" at 6337.33,5261.97 h50
  text "ADDR1" at 3737.33,5111.97 h50 r270
  text "ADDR0" at 4937.33,5111.97 h50 r270
  text "12V" at 7124.83,5061.97 h25 r90
  text "3.3V" at 7124.83,4961.97 h25 r90
  text "GND" at 6637.33,4946.97 h30
  text "M1B" at 3074.83,4936.97 h50
  text "3.3V" at 6187.33,4936.97 h50
  text "M1A" at 3074.83,4836.97 h50
  text "UART" at 4237.33,4836.97 h50 r270
  text "UART" at 4337.33,4836.97 h50 r270
  text "22" at 4437.33,4836.97 h50 r270
  text "24" at 4537.33,4836.97 h50 r270
  text "UART" at 5537.33,4836.97 h50 r270
  text "26" at 5637.33,4836.97 h50 r270
  text "28" at 5737.33,4836.97 h50 r270
  text "AREF" at 6187.33,4836.97 h50
  text "IOREF" at 6637.33,4836.97 h50
  text "M2A" at 3074.83,4736.97 h50
  text "A5" at 6262.33,4736.97 h50
  text "A4" at 6637.33,4736.97 h50
  text "M2B" at 3074.83,4636.97 h50
  text "A7" at 6262.33,4636.97 h50
  text "A6" at 6637.33,4636.97 h50
  text "GND" at 3637.33,4586.97 h50 r90
  text "VIN" at 3737.33,4586.97 h50 r90
  text "12V" at 3837.33,4586.97 h50 r90
  text "A1" at 4937.33,4586.97 h50 r90
  text "A3" at 5037.33,4586.97 h50 r90
  text "DAC1" at 5137.33,4586.97 h50 r90
  text "53" at 5237.33,4586.97 h50 r90
  text "51" at 5337.33,4586.97 h50 r90
  text "49" at 5437.33,4586.97 h50 r90
  text "47" at 5537.33,4586.97 h50 r90
  text "A9" at 6262.33,4536.97 h50
  text "A8" at 6637.33,4536.97 h50
  text "Stepper 2" at 3074.83,4511.97 h50
  text "A11" at 6262.33,4436.97 h50
  text "A10" at 6637.33,4436.97 h50
  text "44" at 6262.33,4336.97 h50
  text "45" at 6637.33,4336.97 h50
  text "42" at 6282.81,4247.63 h50 r55
  text "43" at 6637.33,4236.97 h50
  text "5V" at 3737.33,4211.97 h50 r90
  text "A1" at 4937.33,4211.97 h50 r90
  text "A2" at 5037.33,4211.97 h50 r90
  text "52" at 5237.33,4211.97 h50 r90
  text "50" at 5337.33,4211.97 h50 r90
  text "48" at 5437.33,4211.97 h50 r90
  text "46" at 5537.33,4211.97 h50 r90
  text "12V" at 3837.33,4186.97 h50 r90
  text "3.3V" at 3637.33,4136.97 h50 r90
  text "40" at 6262.33,4136.97 h50
  text "41" at 6637.33,4136.97 h50
  text "DAC0" at 5137.33,4111.97 h50 r90
  text "38" at 6262.33,4036.97 h50
  text "39" at 6637.33,4036.97 h50
  text "36" at 6262.33,3936.97 h50
  text "37" at 6637.33,3936.97 h50
  text "34" at 6262.33,3836.97 h50
  text "35" at 6637.33,3836.97 h50
  text "12V" at 2637.33,3811.97 h50 r270
  text "11" at 3712.33,3811.97 h50 r180
  text "7" at 3889.67,3797.54 h50 r245
  text "16/TX2" at 4937.23,3789.15 h50 r95
  text "18/TX1" at 5037.23,3789.15 h50 r95
  text "20/SDA" at 5137.27,3788.72 h50 r94
  text "13" at 3637.33,3786.97 h50 r90
  text "5" at 3987.33,3786.97 h50 r270
  text "3" at 4087.33,3786.97 h50 r270
  text "1" at 4187.33,3786.97 h50 r270
  text "SCL1" at 4337.33,3786.97 h50 r90
  text "RESET" at 4437.33,3786.97 h50 r90
  text "SCK" at 4537.33,3786.97 h50 r90
  text "MISO" at 4637.33,3786.97 h50 r90
  text "MOSI" at 4737.33,3786.97 h50 r90
  text "TX3" at 4837.33,3786.97 h50 r90
  text "22" at 5237.33,3786.97 h50 r90
  text "24" at 5337.33,3786.97 h50 r90
  text "26" at 5437.33,3786.97 h50 r90
  text "28" at 5537.33,3786.97 h50 r90
  text "9" at 3787.42,3784.79 h50 r275
  text "32" at 6262.33,3736.97 h50
  text "33" at 6637.33,3736.97 h50
  text "30" at 6262.33,3636.97 h50
  text "31" at 6637.33,3636.97 h50
  text "4" at 3992.1,3476.67 h50 r234
  text "8" at 3787.33,3461.97 h50 r270
  text "2" at 4087.33,3461.97 h50 r270
  text "0" at 4187.33,3461.97 h50 r270
  text "6" at 3887.42,3459.79 h50 r275
  text "12" at 3637.33,3436.97 h50 r90
  text "10" at 3737.33,3436.97 h50 r90
  text "SCK" at 6212.33,3436.97 h50
  text "3.3V" at 6637.33,3436.97 h50
  text "23" at 5237.33,3411.97 h50 r90
  text "25" at 5337.33,3411.97 h50 r90
  text "27" at 5437.33,3411.97 h50 r90
  text "29" at 5537.33,3411.97 h50 r90
  text "RX1" at 5037.33,3386.97 h50 r90
  text "GND" at 4537.33,3361.97 h50 r90
  text "RX3" at 4837.33,3361.97 h50 r90
  text "RX2" at 4937.33,3361.97 h50 r90
  text "SCL" at 5137.33,3361.97 h50 r90
  text "M1B" at 3062.33,3336.97 h50
  text "SDA1" at 4337.33,3336.97 h50 r90
  text "3.3V" at 4437.33,3336.97 h50 r90
  text "MOSI" at 6187.33,3336.97 h50
  text "MISO" at 6637.33,3336.97 h50
  text "M1A" at 3062.33,3236.97 h50
  text "23" at 3737.33,3236.97 h50 r90
  text "25" at 3837.33,3236.97 h50 r90
  text "UART" at 3937.33,3236.97 h50 r90
  text "UART" at 4037.33,3236.97 h50 r90
  text "27" at 4937.33,3236.97 h50 r90
  text "29" at 5037.33,3236.97 h50 r90
  text "19/RX1" at 6089.51,3237.07 h50 r5
  text "18/TX1" at 6639.51,3237.07 h50 r5
  text "M2A" at 3062.33,3136.97 h50
  text "21/SCL" at 6089.51,3137.07 h50 r5
  text "20/SDA" at 6639.07,3137.03 h50 r4
  text "M2B" at 3062.33,3036.97 h50
  text "5V" at 6262.33,3036.97 h50
  text "GND" at 6637.33,3036.97 h50
  text "ADDR2" at 4537.33,2961.97 h50 r90
  text "ADDR3" at 5737.33,2961.97 h50 r90
  text "Stepper 3" at 3062.33,2911.97 h50
  text "Driver 3" at 3637.33,2636.97 h50 r90
  text "Driver 4" at 4837.33,2636.97 h50 r90
  text "M1B" at 3062.33,2586.97 h50
  text "M1A" at 3062.33,2486.97 h50
  text "M2A" at 3062.33,2386.97 h50
  text "M1B" at 3937.33,2336.97 h50 r90
  text "M1A" at 4037.33,2336.97 h50 r90
  text "M1B" at 5137.33,2336.97 h50 r90
  text "M1A" at 5237.33,2336.97 h50 r90
  text "M2A" at 4137.33,2311.97 h50 r90
  text "M2B" at 4237.33,2311.97 h50 r90
  text "M2A" at 5337.33,2311.97 h50 r90
  text "M2B" at 5437.33,2311.97 h50 r90
  text "M2B" at 3062.33,2286.97 h50
  text "Octopi Driver" at 6154.82,2162.71 h85 r91
  text "Stepper 4" at 3062.33,2161.97 h50
  text "v0.2.0 Stack" at 6304.83,2161.97 h85 r90
  text "Motion Plane" at 6542.33,2161.97 h60 r90
  text "v0.3.1 for Squid" at 6667.33,2161.97 h60 r90
  text "Prakash Lab / Octopi Team" at 6857.33,2161.97 h40 r90
  text "Stanford University" at 6932.32,2161.62 h40 r89
  text "Localization Board" at 3937.33,2064.47 h45
  text "M1B" at 3162.33,2011.97 h50 r90
  text "M1A" at 3262.33,2011.97 h50 r90
  text "M2A" at 3362.33,2011.97 h50 r90
  text "M2B" at 3462.33,2011.97 h50 r90
Bottom Overlay:
  lines w20 net S$18709: 2637.33,2761.97 2887.33,2761.97 ; 2637.33,3511.97 2887.33,3511.97 ; 2637.33,5111.97 2887.33,5111.97 ; 2637.33,5861.97 2887.33,5861.97 ; 3512.33,3536.97 3512.33,3736.97 ; 3512.33,4336.97 3512.33,4536.97 ; 4037.33,2074.47 4037.33,2399.47 ; 5112.33,2074.47 5112.33,2399.47 ; 6387.33,5061.97 6587.33,5061.97
  text "M1B" at 3012.33,5699.47 h25
  text "M1B" at 3012.33,5649.47 h25
  text "M1A" at 3012.33,5599.47 h25
  text "M2A" at 3012.33,5524.47 h25
  text "M2B" at 3012.33,5474.47 h25
  text "M2B" at 3012.33,5424.47 h25
  text "Stepper 1" at 3262.33,5314.47 h45
  text "M1B" at 3012.33,4949.47 h25
  text "3.3V" at 6337.33,4936.97 h50
  text "GND" at 6787.33,4936.97 h50
  text "M1B" at 3012.33,4899.47 h25
  text "M1A" at 3012.33,4849.47 h25
  text "AREF" at 6337.33,4836.97 h50
  text "IOREF" at 6837.33,4836.97 h50
  text "M2A" at 3012.33,4774.47 h25
  text "DAC1" at 5137.33,4761.97 h50 r90
  text "GND" at 3637.33,4736.97 h50 r90
  text "A5" at 6337.33,4736.97 h50
  text "A4" at 6737.33,4736.97 h50
  text "M2B" at 3012.33,4724.47 h25
  text "VIN" at 3737.33,4711.97 h50 r90
  text "12V" at 3837.33,4711.97 h50 r90
  text "A1" at 4937.33,4686.97 h50 r90
  text "A3" at 5037.33,4686.97 h50 r90
  text "53" at 5237.33,4686.97 h50 r90
  text "51" at 5337.33,4686.97 h50 r90
  text "49" at 5437.33,4686.97 h50 r90
  text "47" at 5537.33,4686.97 h50 r90
  text "M2B" at 3012.33,4674.47 h25
  text "A7" at 6337.33,4636.97 h50
  text "A6" at 6737.33,4636.97 h50
  text "Stepper 2" at 3262.33,4564.47 h45
  text "A9" at 6344.22,4537.94 h50 r16
  text "A8" at 6744.22,4537.94 h50 r16
  text "A11" at 6337.33,4436.97 h50
  text "A10" at 6762.33,4436.97 h50
  text "44" at 6337.33,4336.97 h50
  text "45" at 6737.33,4336.97 h50
  text "3.3V" at 3637.33,4286.97 h50 r90
  text "5V" at 3737.33,4286.97 h50 r90
  text "12V" at 3837.33,4286.97 h50 r90
  text "A1" at 4937.33,4286.97 h50 r90
  text "A2" at 5037.33,4286.97 h50 r90
  text "DAC0" at 5137.33,4286.97 h50 r90
  text "52" at 5237.33,4286.97 h50 r90
  text "50" at 5337.33,4286.97 h50 r90
  text "48" at 5437.33,4286.97 h50 r90
  text "46" at 5537.33,4286.97 h50 r90
  text "42" at 6337.33,4236.97 h50
  text "43" at 6737.33,4236.97 h50
  text "40" at 6337.33,4136.97 h50
  text "41" at 6737.33,4136.97 h50
  text "14/TX3" at 4837.23,4059.79 h50 r85
  text "16/TX2" at 4937.23,4059.79 h50 r85
  text "20/SDA" at 5137.27,4060.23 h50 r86
  text "38" at 6337.33,4036.97 h50
  text "39" at 6738.2,4036.99 h50 r2
  text "18/TX1" at 5037.23,4034.79 h50 r85
  text "RESET" at 4437.33,4011.97 h50 r90
  text "12V" at 2637.33,3986.97 h50 r270
  text "SCL1" at 4337.33,3961.97 h50 r90
  text "MISO" at 4637.33,3961.97 h50 r90
  text "MOSI" at 4737.33,3961.97 h50 r90
  text "SCK" at 4537.33,3936.97 h50 r90
  text "36" at 6338.2,3936.99 h50 r2
  text "37" at 6737.33,3936.97 h50
  text "22" at 5237.33,3886.97 h50 r90
  text "24" at 5337.33,3886.97 h50 r90
  text "26" at 5437.33,3886.97 h50 r90
  text "28" at 5537.33,3886.97 h50 r90
  text "13" at 3637.33,3861.97 h50 r90
  text "7" at 3934.98,3847.54 h50 r115
  text "5" at 4037.33,3836.97 h50 r90
  text "3" at 4137.33,3836.97 h50 r90
  text "34" at 6337.33,3836.97 h50
  text "35" at 6737.33,3836.97 h50
  text "9" at 3837.23,3834.79 h50 r85
  text "11" at 3712.33,3811.97 h50
  text "1" at 4237.33,3811.97 h50 r90
  text "32" at 6337.33,3736.97 h50
  text "33" at 6737.33,3736.97 h50
  text "30" at 6338.2,3636.99 h50 r2
  text "31" at 6737.33,3636.97 h50
  text "4" at 4032.55,3476.67 h50 r126
  text "12" at 3637.33,3461.97 h50 r90
  text "10" at 3737.33,3461.97 h50 r90
  text "8" at 3837.33,3461.97 h50 r90
  text "2" at 4137.33,3461.97 h50 r90
  text "0" at 4237.33,3461.97 h50 r90
  text "SDA1" at 4337.33,3461.97 h50 r90
  text "3.3V" at 4437.33,3461.97 h50 r90
  text "GND" at 4537.33,3461.97 h50 r90
  text "23" at 5237.33,3461.97 h50 r90
  text "25" at 5337.33,3461.97 h50 r90
  text "27" at 5437.33,3461.97 h50 r90
  text "29" at 5537.33,3461.97 h50 r90
  text "6" at 3937.23,3459.79 h50 r85
  text "15/RX3" at 4837.23,3459.79 h50 r85
  text "17/RX2" at 4937.23,3459.79 h50 r85
  text "21/SCL" at 5137.23,3459.79 h50 r85
  text "19/RX1" at 5037.19,3459.36 h50 r84
  text "SCK" at 6337.33,3436.97 h50
  text "M1B" at 3012.33,3349.47 h25
  text "MOSI" at 6337.33,3336.97 h50
  text "MISO" at 6812.33,3336.97 h50
  text "M1B" at 3012.33,3299.47 h25
  text "10IN" at 3669.83,3276.97 h25 r90
  text "GND" at 3969.83,3276.97 h25 r90
  text "GND" at 4459.83,3276.97 h25 r90
  text "9IN" at 3769.83,3261.97 h25 r90
  text "8IN" at 3869.83,3261.97 h25 r90
  text "4IN" at 4159.83,3261.97 h25 r90
  text "3IN" at 4259.83,3261.97 h25 r90
  text "2IN" at 4359.83,3261.97 h25 r90
  text "M1A" at 3012.33,3249.47 h25
  text "10" at 3719.83,3246.97 h25 r90
  text "4" at 4207.44,3244.32 h25 r126
  text "8" at 3919.83,3236.97 h25 r90
  text "3" at 4309.83,3236.97 h25 r90
  text "2" at 4409.83,3236.97 h25 r90
  text "19/RX1" at 6335.15,3237.07 h50 r355
  text "18/TX1" at 6910.15,3237.07 h50 r355
  text "9" at 3819.78,3235.88 h25 r85
  text "M2A" at 3012.33,3174.47 h25
  text "21/SCL" at 6335.15,3137.07 h50 r355
  text "20/SDA" at 6935.58,3137.03 h50 r356
  text "M2B" at 3012.33,3124.47 h25
  text "M2B" at 3012.33,3074.47 h25
  text "5V" at 6337.33,3036.97 h50
  text "GND" at 6787.33,3036.97 h50
  text "Stepper 3" at 3262.33,2964.47 h45
  text "7" at 4258.66,2862.26 h25 r115
  text "VCCIN" at 3659.83,2856.97 h25 r90
  text "13IN" at 3709.83,2856.97 h25 r90
  text "13" at 3759.83,2856.97 h25 r90
  text "12IN" at 3809.83,2856.97 h25 r90
  text "12" at 3859.83,2856.97 h25 r90
  text "11IN" at 3909.83,2856.97 h25 r90
  text "VCCIN" at 4159.83,2856.97 h25 r90
  text "7IN" at 4209.83,2856.97 h25 r90
  text "6IN" at 4309.83,2856.97 h25 r90
  text "5IN" at 4409.83,2856.97 h25 r90
  text "5" at 4459.83,2856.97 h25 r90
  text "6" at 4359.78,2855.88 h25 r85
  text "11" at 3947.33,2844.47 h25
  text "M1B" at 3012.33,2599.47 h25
  text "M1B" at 3012.33,2549.47 h25
  text "M1A" at 3012.33,2499.47 h25
  text "VCCIN" at 3774.83,2486.97 h25 r90
  text "3.3V" at 3849.83,2461.97 h25 r90
  text "5V" at 3724.83,2436.97 h25 r90
  text "13IN" at 3899.83,2436.97 h25 r90
  text "12IN" at 4324.83,2436.97 h25 r90
  text "11IN" at 4374.83,2436.97 h25 r90
  text "10IN" at 4449.83,2436.97 h25 r90
  text "9IN" at 4499.83,2436.97 h25 r90
  text "8IN" at 4549.83,2436.97 h25 r90
  text "7IN" at 4624.83,2436.97 h25 r90
  text "6IN" at 4674.83,2436.97 h25 r90
  text "5IN" at 4749.83,2436.97 h25 r90
  text "4IN" at 4799.83,2436.97 h25 r90
  text "3IN" at 4849.83,2436.97 h25 r90
  text "2IN" at 4924.83,2436.97 h25 r90
  text "GND" at 4974.83,2436.97 h25 r90
  text "M2A" at 3012.33,2424.47 h25
  text "M2B" at 3012.33,2374.47 h25
  text "M2B" at 3012.33,2324.47 h25
  text "Stepper 4" at 3262.33,2214.47 h45
  text "Localization Board" at 5737.33,2064.47 h45
  text "Stepper 4" at 3412.33,1989.47 h45